# EAGLE board APT2055 PROJECT (EAGLE 9.7.0)

Size 210.75 x 104.4 mm. Coordinates in mm from the lower left corner, seen from the top.
Outline: 0,0 210.75,0 210.75,104.4 0,104.4 0,0
Copper layers (1*16): Top 0.035mm / dielectric 1.5mm / Bottom 0.035mm
Design rules "default": minimum track width 6mil, minimum drill 0.35mm, track to track 6mil, track to pad 6mil, pad to pad 6mil, via to via 6mil, smd to smd 6mil, copper to edge 40mil, drill to drill 6mil, minimum pad ring 10mil, minimum via ring 8mil, stop-mask expansion 4mil, vias tented up to drill 0mil, thermal gap 10mil

## Footprints (pad centres in the part's own frame; a part is rotated, then mirrored left to right if it is on the bottom)
LED-RGB-5MM = drill 0.9: B 0.635,0.635; C -0.635,-0.635; G 1.905,-0.635; R -1.905,0.635
PIEZO = drill 1 pad 1.6: 1 -3.5,0; 2 3.5,0
RESAD1016W63L850D250B = drill 0.83 pad 1.43: 1 -5.08,0; 2 5.08,0
SWITCH-MOMENTARY-PTH-6.5MM = drill 1.016 pad 1.88: 1 -3.251,2.261; 2 3.251,2.261; 3 -3.251,-2.261; 4 3.251,-2.261
ARDUINO-UNO-R3-SHIELD = drill 1.016 pad 1.88: 3.3V 24.13,-2.54; 5V 24.13,0; A0 24.13,12.7; A1 24.13,15.24; A2 24.13,17.78; A3 24.13,20.32; A4 24.13,22.86; A5 24.13,25.4; AREF -24.13,-13.97; D2 -24.13,20.32; D3 -24.13,17.78; D4 -24.13,15.24; D5 -24.13,12.7; D6 -24.13,10.16; D7 -24.13,7.62; D8 -24.13,3.81; D9 -24.13,1.27; D10 -24.13,-1.27; D11 -24.13,-3.81; D12 -24.13,-6.35; D13 -24.13,-8.89; GND@0 24.13,2.54; GND@1 24.13,5.08; GND@2 -24.13,-11.43; IOREF 24.13,-7.62; NC 24.13,-10.16; RES 24.13,-5.08; RX -24.13,25.4; SCL -24.13,-19.05; SDA -24.13,-16.51; TX -24.13,22.86; VIN 24.13,7.62
JHD-162A = drill 1.016 long: 1 -19.05,0; 2 -16.51,0; 3 -13.97,0; 4 -11.43,0; 5 -8.89,0; 6 -6.35,0; 7 -3.81,0; 8 -1.27,0; 9 1.27,0; 10 3.81,0; 11 6.35,0; 12 8.89,0; 13 11.43,0; 14 13.97,0; 15 16.51,0; 16 19.05,0

## Placement (x,y rotation side)
D1  LED-RGBRCBG-PTH  [LED-RGB-5MM]  104.33,41.58 0 top
PIEZO1  PIEZO  [PIEZO]  114.49,46.66 0 top
R1  220  [RESAD1016W63L850D250B]  174.18,51.74 90 top
R2  1k  [RESAD1016W63L850D250B]  103.06,33.96 90 top
R3  220  [RESAD1016W63L850D250B]  158.96,87.65 90 top
R4  220  [RESAD1016W63L850D250B]  151.29,88.15 90 top
S1  SWITCH_MOMENTARY  [SWITCH-MOMENTARY-PTH-6.5MM]  148.75,97.04 90 top
S2  SWITCH_MOMENTARY  [SWITCH-MOMENTARY-PTH-6.5MM]  156.42,96.54 90 top
U1  ARDUINO-UNO-R3-SHIELD  [ARDUINO-UNO-R3-SHIELD]  47.88,31.07 270 top
U2  LCD-16X2JHD-162A  [JHD-162A]  155.13,36.63 0 top

## Library data of the parts
D1 PIEZO1 R1-R4 S1 S2 U1 U2 = Tinkercad

## Nets
D1_C: D1.C R2.2
U1_5V: S1.1 S2.1 U1.5V U2.2 U2.15
U1_D2: U1.D2 U2.4
U1_D3: U1.D3 U2.6
U1_D4: U1.D4 U2.11
U1_D5: U1.D5 U2.12
U1_D6: U1.D6 U2.13
U1_D7: U1.D7 U2.14
U1_D8: D1.G PIEZO1.1 U1.D8 U1.D9
U1_D10: D1.B U1.D10
U1_D11: D1.R U1.D11
U1_D12: R4.2 S1.3 S1.4 U1.D12
U1_D13: R3.2 S2.3 S2.4 U1.D13
U1_GND: PIEZO1.2 R1.2 R2.1 R3.1 R4.1 U1.GND@0 U1.GND@1 U1.GND@2 U2.1 U2.3 U2.5
U2_LED-: R1.1 U2.16

## Tracks (layer width: path | path; a pad name or v marks a point on that pad's centre or on a via)
D1_C  (1 unrouted)
U1_5V  (4 unrouted)
U1_D2  (1 unrouted)
U1_D3  (1 unrouted)
U1_D4  (1 unrouted)
U1_D5  (1 unrouted)
U1_D6  (1 unrouted)
U1_D7  (1 unrouted)
U1_D8  (3 unrouted)
U1_D10  (1 unrouted)
U1_D11  (1 unrouted)
U1_D12  (3 unrouted)
U1_D13  (3 unrouted)
U1_GND  (10 unrouted)
U2_LED-  (1 unrouted)